# EAGLE board LIP_3_Trabalho (EAGLE 9.7.0)

Size 166.07 x 61.24 mm. Coordinates in mm from the lower left corner, seen from the top.
Outline: 0,0 166.06,0 166.06,61.24 0,61.24 0,0
Copper layers (1*16): Top 0.035mm / dielectric 1.5mm / Bottom 0.035mm
Design rules "default": minimum track width 6mil, minimum drill 0.35mm, track to track 6mil, track to pad 6mil, pad to pad 6mil, via to via 6mil, smd to smd 6mil, copper to edge 40mil, drill to drill 6mil, minimum pad ring 10mil, minimum via ring 8mil, stop-mask expansion 4mil, vias tented up to drill 0mil, thermal gap 10mil

## Footprints (pad centres in the part's own frame; a part is rotated, then mirrored left to right if it is on the bottom)
LEDRD254W60D565H860B = drill 0.981 pad 1.581: 1 -1.27,0; 2 1.27,0
PIEZO = drill 1 pad 1.6: 1 -3.5,0; 2 3.5,0
RESAD1016W63L850D250B = drill 0.83 pad 1.43: 1 -5.08,0; 2 5.08,0
TSOP48 = drill 0.8: 1 -2.54,0; 2 0,0; 3 2.54,0
ARDUINO-UNO-R3-SHIELD = drill 1.016 pad 1.88: 3.3V 24.13,-2.54; 5V 24.13,0; A0 24.13,12.7; A1 24.13,15.24; A2 24.13,17.78; A3 24.13,20.32; A4 24.13,22.86; A5 24.13,25.4; AREF -24.13,-13.97; D2 -24.13,20.32; D3 -24.13,17.78; D4 -24.13,15.24; D5 -24.13,12.7; D6 -24.13,10.16; D7 -24.13,7.62; D8 -24.13,3.81; D9 -24.13,1.27; D10 -24.13,-1.27; D11 -24.13,-3.81; D12 -24.13,-6.35; D13 -24.13,-8.89; GND@0 24.13,2.54; GND@1 24.13,5.08; GND@2 -24.13,-11.43; IOREF 24.13,-7.62; NC 24.13,-10.16; RES 24.13,-5.08; RX -24.13,25.4; SCL -24.13,-19.05; SDA -24.13,-16.51; TX -24.13,22.86; VIN 24.13,7.62

## Placement (x,y rotation side)
D1  RED  [LEDRD254W60D565H860B]  148.31,14.05 180 top
PIEZO1  PIEZO  [PIEZO]  153.39,29.29 0 top
R1  1k  [RESAD1016W63L850D250B]  149.58,8.97 90 top
R2  1k  [RESAD1016W63L850D250B]  157.2,8.97 90 top
R3  1k  [RESAD1016W63L850D250B]  159.74,44.53 90 top
U1  IR-RECEIVERTSOP48  [TSOP48]  157.2,14.05 0 top
U4  ARDUINO-UNO-R3-SHIELD  [ARDUINO-UNO-R3-SHIELD]  47.88,31.39 270 top

## Library data of the parts
D1 = Tinkercad; CATEGORY: Opto-Electronic; SUB-CATEGORY: LED; VALUE: LED_RED
PIEZO1 R1-R3 U1 U4 = Tinkercad

## Nets
D1_A: D1.1 R1.2
PIEZO1_2: PIEZO1.2 R3.1
U1_GND: R2.2 U1.2
U4_5V: U1.3 U4.5V
U4_D3: D1.2 U4.D3
U4_D4: U1.1 U4.D4
U4_D5: PIEZO1.1 U4.D5
U4_GND: R1.1 R2.1 R3.2 U4.GND@0 U4.GND@1 U4.GND@2

## Tracks (layer width: path | path; a pad name or v marks a point on that pad's centre or on a via)
D1_A  (1 unrouted)
PIEZO1_2  (1 unrouted)
U1_GND  (1 unrouted)
U4_5V  (1 unrouted)
U4_D3  (1 unrouted)
U4_D4  (1 unrouted)
U4_D5  (1 unrouted)
U4_GND  (5 unrouted)